# EAGLE board dac (EAGLE 9.0.1)
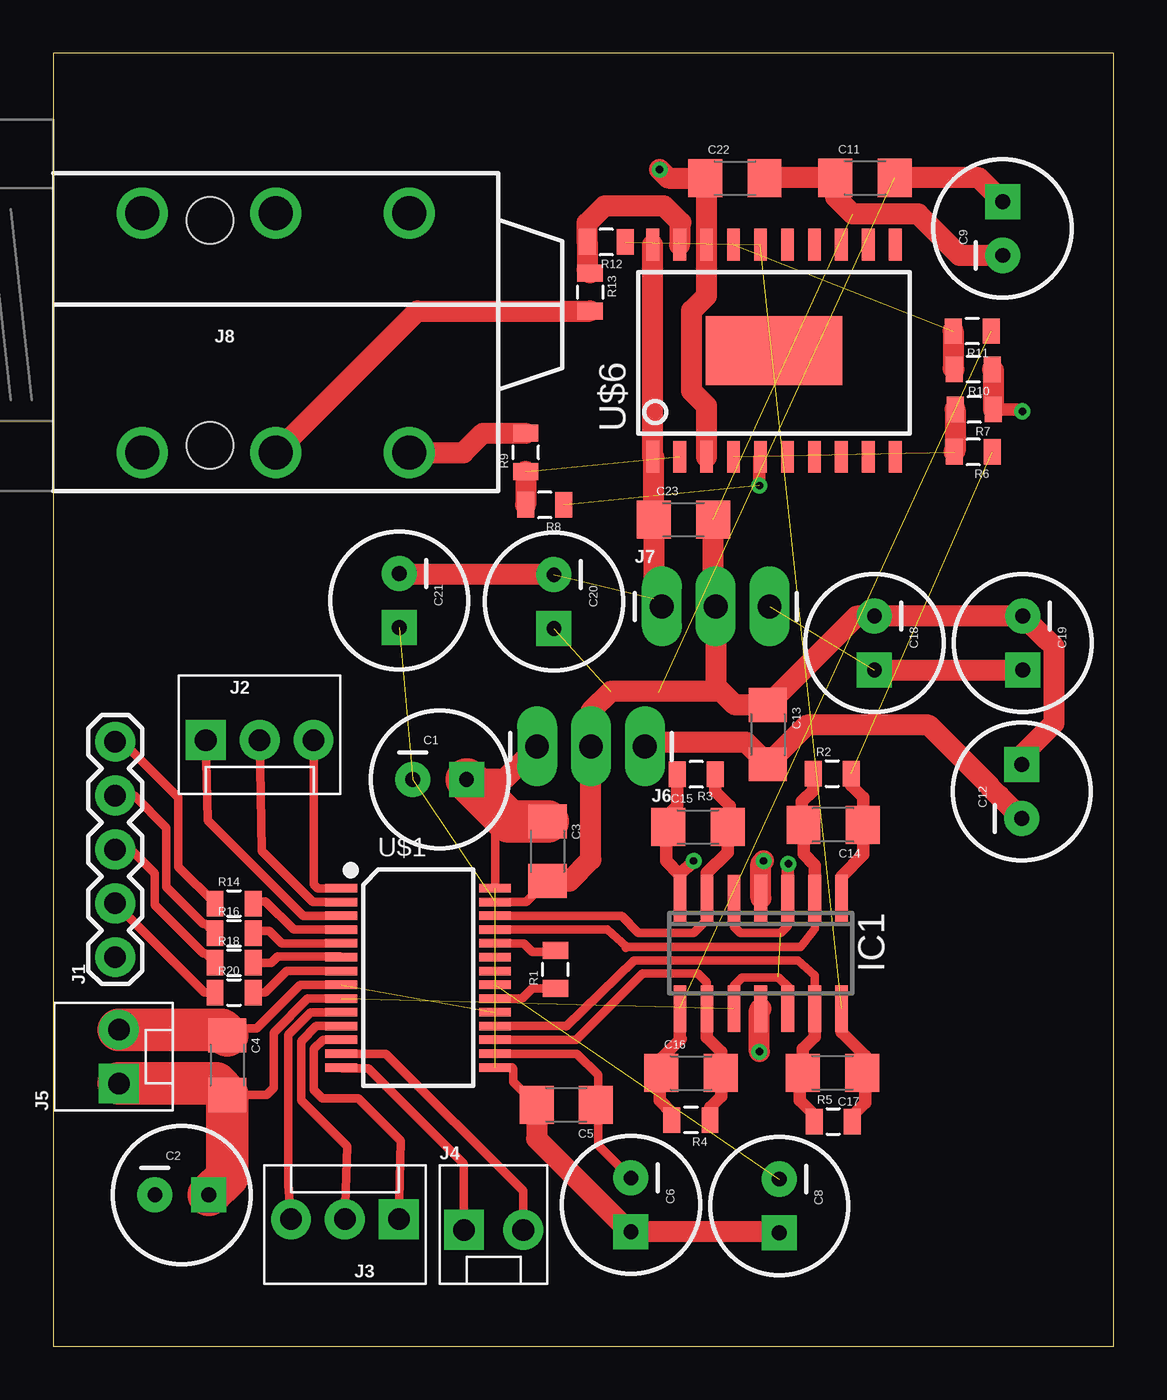
[diagram p0: board, top side]
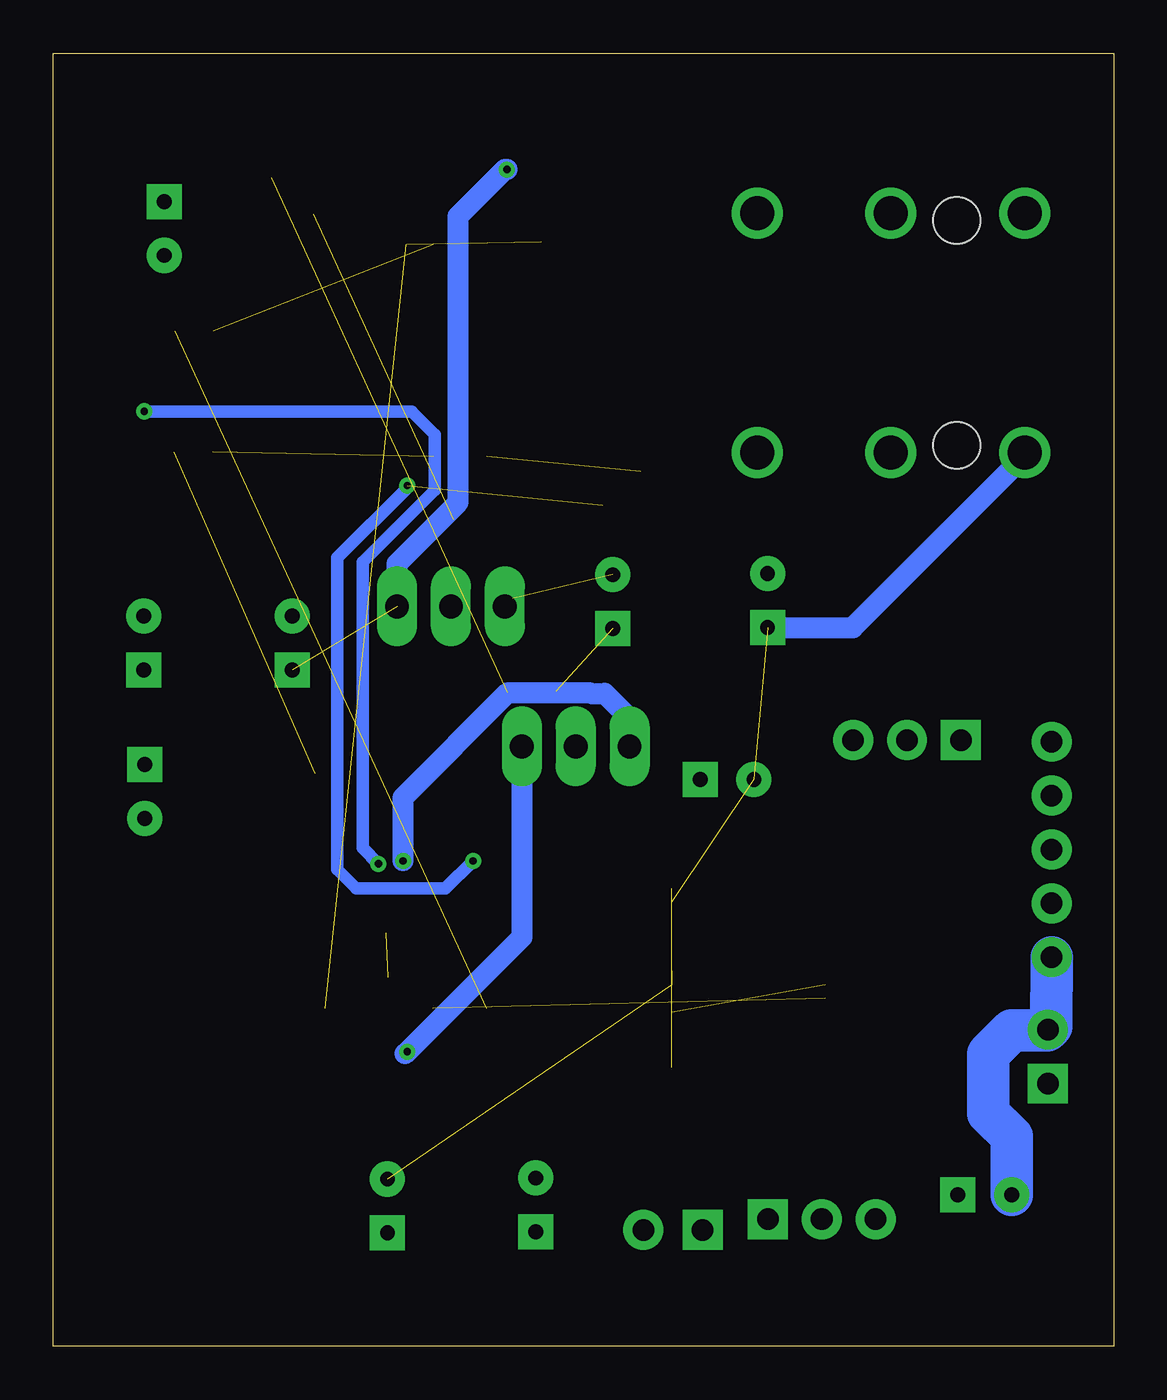
[diagram p1: board, bottom side, seen from below]

Size 50 x 61 mm. Coordinates in mm from the lower left corner, seen from the top.
Outline: 0,0 50,0 50,61 0,61 0,0
Copper layers (1*16): Top 0.035mm / dielectric 0.2mm / Bottom 0.035mm
Design rules "default *": minimum track width 6mil, minimum drill 0.35mm, track to track 6mil, track to pad 6mil, pad to pad 6mil, via to via 6mil, smd to smd 6mil, copper to edge 40mil, drill to drill 6mil, minimum pad ring 10mil, minimum via ring 8mil, stop-mask expansion 4mil, vias tented up to drill 0mil, thermal gap 10mil

## Footprints (pad centres in the part's own frame; a part is rotated, then mirrored left to right if it is on the bottom)
CPOL-RADIAL-100UF-25V = drill 0.7 pad 1.651 square: 1 1.27,0 | drill 0.7 pad 1.651: 2 -1.27,0
1206 = smd 1.6 x 1.8: 1 -1.4,0; 2 1.4,0
SO14 = smd 0.6 x 2.2: 1 -3.81,-2.6; 2 -2.54,-2.6; 3 -1.27,-2.6; 4 0,-2.6; 5 1.27,-2.6; 6 2.54,-2.6; 7 3.81,-2.6; 8 3.81,2.6; 9 2.54,2.6; 10 1.27,2.6; 11 0,2.6; 12 -1.27,2.6; 13 -2.54,2.6; 14 -3.81,2.6
1X05 = drill 1.016 pad 1.88: 1 0,0; 2 2.54,0; 3 5.08,0; 4 7.62,0; 5 10.16,0
MOLEX-1X3 = drill 1.016 pad 1.88 square: 1 0,0 | drill 1.016 pad 1.88: 2 2.54,0; 3 5.08,0
MOLEX-1X2_LOCK = drill 1.016 pad 1.88 square: 1 -0.127,0 | drill 1.016 pad 1.88: 2 2.667,0
MOLEX-1X2 = drill 1.016 pad 1.88 square: 1 0,0 | drill 1.016 pad 1.88: 2 2.54,0
1X03_LONGPADS = drill 1.118 pad 1.88 long: 1 0,0; 2 2.54,0; 3 5.08,0
AUDIO_JACK_0.25"_TRS_PTH_RA = drill 1.6: RING 10.5,-6.95; RING-NORM 10.5,4.35; SLEEVE 4.2,-6.95; SLEEVE-NORM 4.2,4.35; TIP 16.8,-6.95; TIP-NORM 16.8,4.35 | hole 2.2: 7.4,4; 7.4,-6.6
0805 = smd 0.8 x 1.2: 1 -0.9,0; 2 0.9,0
SSOP28-0.65-10.2X5.2MM = smd 0.4 x 1.5: 1 -4.225,-3.625; 2 -3.575,-3.625; 3 -2.925,-3.625; 4 -2.275,-3.625; 5 -1.625,-3.625; 6 -0.975,-3.625; 7 -0.325,-3.625; 8 0.325,-3.625; 9 0.975,-3.625; 10 1.625,-3.625; 11 2.275,-3.625; 12 2.925,-3.625; 13 3.575,-3.625; 14 4.225,-3.625; 15 4.225,3.625; 16 3.575,3.625; 17 2.925,3.625; 18 2.275,3.625; 19 1.625,3.625; 20 0.975,3.625; 21 0.325,3.625; 22 -0.325,3.625; 23 -0.975,3.625; 24 -1.625,3.625; 25 -2.275,3.625; 26 -2.925,3.625; 27 -3.575,3.625; 28 -4.225,3.625
SOIC20S = smd 0.6 x 1.5: 1 -5.715,-5; 2 -4.445,-5; 3 -3.175,-5; 4 -1.905,-5; 5 -0.635,-5; 6 0.635,-5; 7 1.905,-5; 8 3.175,-5; 9 4.445,-5; 10 5.715,-5; 11 5.715,5; 12 4.445,5; 13 3.175,5; 14 1.905,5; 15 0.635,5; 16 -0.635,5; 17 -1.905,5; 18 -3.175,5; 19 -4.445,5; 20 -5.715,5 | smd 6.452 x 3.251: P$1 0,0

## Placement (x,y rotation side)
C1  10uF  [CPOL-RADIAL-100UF-25V]  18.23,26.75 0 top
C2  10uF  [CPOL-RADIAL-100UF-25V]  6.08,7.14 0 top
C3  0.1uF  [1206]  23.31,23.35 270 top
C4  0.1uF  [1206]  8.21,13.27 270 top
C5  0.1uF  [1206]  24.19,11.39 180 top
C6  10uF  [CPOL-RADIAL-100UF-25V]  27.25,6.67 270 top
C8  47uF  [CPOL-RADIAL-100UF-25V]  34.23,6.62 270 top
C9  10uF  [CPOL-RADIAL-100UF-25V]  44.77,52.73 90 top
C11  0.1uF  [1206]  38.29,55.11 0 top
C12  10uF  [CPOL-RADIAL-100UF-25V]  45.67,26.18 90 top
C13  0.1uF  [1206]  33.7,28.86 270 top
C14  2.7nF  [1206]  36.78,24.6 180 top
C15  2.7nF  [1206]  30.4,24.5 0 top
C16  2.7nF  [1206]  30.08,12.9 0 top
C17  2.7nF  [1206]  36.74,12.9 180 top
C18  100uF  [CPOL-RADIAL-100UF-25V]  38.73,33.17 270 top
C19  10uF  [CPOL-RADIAL-100UF-25V]  45.72,33.17 270 top
C20  10uF  [CPOL-RADIAL-100UF-25V]  23.61,35.12 270 top
C21  100uF  [CPOL-RADIAL-100UF-25V]  16.32,35.17 270 top
C22  0.1uF  [1206]  32.14,55.1 0 top
C23  0.1uF  [1206]  29.72,39 0 top
IC1  OPA4134UA  [SO14]  33.37,18.54 180 top
J1  [1X05]  2.93,18.36 90 top
J2  [MOLEX-1X3]  7.2,28.6 0 top
J3  [MOLEX-1X3]  16.3,6 180 top
J4  [MOLEX-1X2_LOCK]  19.5,5.5 0 top
J5  [MOLEX-1X2]  3.1,12.4 90 top
J6  [1X03_LONGPADS]  27.9,28.3 180 top
J7  [1X03_LONGPADS]  28.7,34.9 0 top
J8  AUDIO_JACK_TRS_0.25"_PTH_RA  [AUDIO_JACK_0.25"_TRS_PTH_RA]  0,49.1 0 top
R1  10K  [0805]  23.68,17.78 90 top
R2  1K  [0805]  36.73,27.02 0 top
R3  1K  [0805]  30.32,26.98 180 top
R4  1K  [0805]  30.07,10.69 180 top
R5  1K  [0805]  36.78,10.62 0 top
R6  1K  [0805]  43.38,42.19 180 top
R7  1K  [0805]  43.43,44.19 180 top
R8  1K  [0805]  23.18,39.69 180 top
R9  39.2  [0805]  22.29,42.17 90 top
R10  1K  [0805]  43.38,46.09 180 top
R11  1K  [0805]  43.34,47.88 180 top
R12  1K  [0805]  26.08,52.08 180 top
R13  39.2  [0805]  25.32,49.73 270 top
R14  [0805]  8.54,20.89 0 top
R16  [0805]  8.54,19.49 0 top
R18  [0805]  8.54,18.09 0 top
R20  [0805]  8.54,16.7 0 top
U$1  PCM1794A  [SSOP28-0.65-10.2X5.2MM]  17.21,17.39 270 top
U$6  TPA6120A2  [SOIC20S]  33.99,46.96 0 top

## Library data of the parts
C1-C6 C8 C9 C11-C23 R1-R14 R16 R18 R20 = SparkFun-Passives
IC1 = linear; SPICEPREFIX: J
J1 J6 J7 = SparkFun-Connectors
J2 J3 = SparkFun-Connectors; PROD_ID: CONN-08625; SF_ID: PRT-08096
J4 J5 = SparkFun-Connectors; SF_ID: PRT-09918
J8 = SparkFun-Connectors; PROD_ID: CONN-12339; SF_ID: COM-11144
U$1 U$6 = EduAreaLib

## Nets
3.3V: C2.1 C4.2 IC1.3 IC1.5 IC1.10 IC1.12 J5.1 R7.1 R10.1 U$1.9
5V: C1.1 C3.1 C5.2 C6.1 C8.1 C9.1 C11.2 IC1.4 J6.3 U$1.15 U$1.23 U$1.28
!RST!: J4.1 U$1.14
+12V: C18.1 C19.1 C22.1 J7.3 U$6.3 U$6.18
-5V: C12.2 C13.2 IC1.11 J6.1
-12V: C20.2 C21.2 C23.1 J7.1 U$6.1 U$6.20
BCK: R18.2 U$1.6
CHSL: J2.2 U$1.2
DATA: R16.2 U$1.5
DEM: J2.1 U$1.3
DGND: C1.2 C2.2 C3.2 C4.1 C5.1 C6.2 C9.2 C11.1 C12.1 C13.1 C18.2 C19.2 C20.1 C21.1 C22.2 C23.2 J1.1 J5.2 J6.2 J7.2 J8.SLEEVE R1.2 U$1.8 U$1.16 U$1.19 U$1.24 U$1.27
FMT0: J3.2 U$1.11
FMT1: J3.1 U$1.12
LOUT: J8.TIP R9.2
LRCK: R14.2 U$1.4
MONO: J2.3 U$1.1
MUTE: J3.3 U$1.10
N$1: C15.2 IC1.6 R3.1 U$1.26
N$2: C14.2 IC1.2 R2.1 U$1.25
N$3: R1.1 U$1.20
N$4: R6.2 R7.2 U$6.4
N$5: C14.1 IC1.1 R2.2 R6.1
N$6: C8.2 U$1.21 U$1.22
N$7: J1.5 R14.1
N$8: C15.1 IC1.7 R3.2 R8.1 U$6.5
N$9: R8.2 R9.1 U$6.2
N$10: R10.2 R11.2 U$6.17
N$11: R12.2 R13.1 U$6.19
N$12: C16.1 IC1.8 R4.2 R11.1
N$13: J1.4 R16.1
N$14: C16.2 IC1.9 R4.1 U$1.17
N$16: J1.3 R18.1
N$17: C17.2 IC1.13 R5.1 U$1.18
N$19: J1.2 R20.1
N$25: C17.1 IC1.14 R5.2 R12.1 U$6.16
ROUT: J8.RING R13.2
SYSCK: R20.2 U$1.7
ZERO: J4.2 U$1.13

## Tracks (layer width: path | path; a pad name or v marks a point on that pad's centre or on a via)
3.3V  (via drill 0.35)  (2 unrouted)
  Top 0.4: U$1.9 12.01,16.41 10.4,14.8 10.4,12.2 10.07,11.87 C4.2 | IC1.3 34.64,19.84 34.3,19.5 32.4,19.5 32.1,19.8 IC1.5 | IC1.10 32.1,17 32.5,17.4 34.2,17.4 34.7,16.9 34.64,16.84 IC1.12
  Top 0.6: IC1.3 34.64,22.76 34.6,22.8 34.62,22.8 v34.66,22.76 | v45.7,44.1 45.62,44.19 R7.1
  Top 1: R10.1 44.33,46.04 R7.1
  Top 2: J5.1 7.69,12.4 C4.2 8.21,8.01 C2.1
  Bottom 0.6: v34.66,22.76 35.4,23.5 35.4,37 32,40.4 32,43 33.1,44.1 v45.7,44.1
5V  (via drill 0.35)  (3 unrouted)
  Top 0.4: U$1.28 20.84,24.11 21.49,24.75 | C5.2 21.7,12.48 21.7,13.1 21.64,13.16 U$1.15
  Top 1: C8.1 34.19,5.41 C6.1 27.2,5.41 22.8,9.8 C5.2 | J6.3 21.27,26.75 C1.1 | IC1.4 33.37,22.77 v33.5,22.9 | C9.1 43.65,55.11 C11.2
  Top 2: C3.1 21.49,24.75 C1.1
  Bottom 1: v33.5,22.9 33.5,25.89 28.56,30.83 24.7,30.83 24.67,30.8 24,30.8 22.82,29.62 J6.3
!RST!
  Top 0.4: J4.1 19.37,8.62 14.87,13.12 13.63,13.12 U$1.14
+12V  (via drill 0.35)  (1 unrouted)
  Top 1: C18.1 C19.1 | U$6.3 30.81,44.36 30.11,45.06 30.11,48.85 30.81,49.56 U$6.18 30.81,55.03 C22.1 29,55.1 v28.6,55.5
  Bottom 1: J7.3 33.78,36.92 30.9,39.8 30.9,53.3 28.7,55.5 v28.6,55.5
-5V  (via drill 0.35)
  Top 1: v33.3,13.9 33.3,15.87 IC1.11 | J6.1 28.1,28.5 32.66,28.5 C13.2 35.54,29.3 41.28,29.3 44.2,26.38 44.2,26.35 44.58,25.97 44.61,25.97 C12.2
  Bottom 1: J6.1 27.9,19.3 v33.3,13.9 33.4,13.8
-12V  (1 unrouted)
  Top 1: J7.1 28.32,35.28 C23.1 28.32,41.91 U$6.1 U$6.20 | C20.2 16.36,36.4 C21.2
BCK
  Top 0.4: R18.2 10.29,18.09 10.6,18.4 13.55,18.4 U$1.6
CHSL
  Top 0.4: U$1.2 12.24,20.96 9.84,23.36 J2.2
DATA
  Top 0.4: U$1.5 10.79,19.01 10.2,19.6 9.54,19.6 R16.2
DEM
  Top 0.4: U$1.3 11.79,20.31 7.3,24.8 J2.1
DGND  (8 unrouted)
  Top 0.4: C4.1 8.54,15 9.6,15 11.66,17.06 U$1.8 | U$1.24 22.19,19.01 22.6,18.6 23.6,18.6 R1.2 | U$1.27 22.32,20.96 C3.2 | U$1.16 24.69,13.81 25.7,12.8 25.7,11 | 25.7,11 25.8,10.9 | 25.7,11 25.59,11.11 C5.1 | C6.2 25.7,9.49 25.7,11
  Top 1: C3.2 24.35,21.95 25.36,22.96 J6.2 | C13.1 32.14,30.26 31.5,30.9 | 31.5,30.9 26.3,30.9 25.36,29.96 J6.2 | 33.74,30.3 C13.1 | J6.2 25.2,28.46 | 31.5,30.9 31.24,31.16 J7.2 31.12,35.02 C23.2 | C13.1 37.88,34.45 C18.2 C19.2 46.78,33.38 46.81,33.38 47.19,33 47.19,29.39 45.67,27.88 C12.1 | C22.2 33.55,55.11 C11.1 36.89,54.21 37.7,53.4 40.8,53.4 42.74,51.45 C9.2
  Top 2: C4.1 7.95,14.94 J5.2
  Bottom 1: J8.SLEEVE 4.78,41.57 4.78,41.42 12.29,33.91 C21.1
  Bottom 2: C2.2 4.8,9.9 5.9,11 5.9,13.8 4.8,14.9 3.14,14.9 J5.2 2.95,15.09 J1.1
FMT0
  Top 0.4: 13.58,15.1 U$1.11 12.41,15.11 11.7,14.4 11.7,11.6 13.86,9.44 J3.2
FMT1
  Top 0.4: J3.1 16.4,9.7 14.4,11.7 12.7,11.7 12.3,12.1 12.3,14.03 12.74,14.47 U$1.12
LOUT
  Top 1: J8.TIP 19.35,42.15 20.27,43.07 R9.2
LRCK
  Top 0.4: U$1.4 11.34,19.66 10,21 9.55,21 R14.2
MONO
  Top 0.4: U$1.1 12.49,21.61 12.3,21.8 12.3,26.52 J2.3
MUTE
  Top 0.4: U$1.10 12.16,15.76 11.1,14.7 11.1,7.62 J3.3
N$1
  Top 0.4: IC1.6 30.83,20.13 30.2,19.5 27.6,19.5 26.8,20.3 U$1.26
  Top 0.6: R3.1 31.22,26.18 31.9,25.5 31.9,24.6 C15.2 31.8,23.3 30.83,22.33 IC1.6
N$2
  Top 0.4: U$1.25 26.14,19.66 27.05,18.85 | 27.05,18.85 27,18.8 | 27.05,18.85 35.25,18.85 35.9,19.7 35.91,19.79 IC1.2
  Top 0.6: IC1.2 35.91,22.69 35.38,23.22 35.38,24.2 | 35.38,24.2 C14.2 | R2.1 35.83,26.23 35.3,25.7 35.3,24.28 35.38,24.2
N$3
  Top 0.4: U$1.20 22.11,16.41 22.58,16.88 R1.1
N$4  (1 unrouted)
  Top 1: R7.2 42.53,42.24 R6.2
N$5  (1 unrouted)
  Top 0.6: R2.2 37.63,26.47 38.2,25.9 38.2,24.62 | 38.2,24.62 C14.1 | IC1.1 37.18,22.18 38.2,23.2 38.2,24.62
N$6  (2 unrouted)
N$7
  Top 0.4: R14.1 5.9,22.62 5.9,25.9 3.28,28.52 J1.5
N$8  (via drill 0.35)  (1 unrouted)
  Top 0.6: 28.9,24.4 28.9,22.9 29.56,22.24 IC1.7 29.56,22.26 v30.2,22.9 | 28.9,24.4 C15.1 | R3.2 29.42,25.52 28.9,25 28.9,24.4 | v33.3,40.6 33.3,41.91 U$6.5
  Bottom 0.6: v30.2,22.9 31.5,21.6 35.7,21.6 36.6,22.5 36.6,37.2 33.4,40.4 33.4,40.5 v33.3,40.6
N$9  (1 unrouted)
  Top 1: R9.1 R8.2
N$10  (1 unrouted)
  Top 1: R11.2 42.44,46.13 R10.2
N$11
  Top 1: R13.1 25.18,50.77 R12.2 25.18,52.98 26,53.8 28.8,53.8 29.6,53 29.54,52.94 U$6.19
N$12  (1 unrouted)
  Top 0.6: IC1.8 29.56,14.54 29.6,14.5 28.68,13.58 C16.1 28.6,12.82 28.6,11.6 29.17,11.03 R4.2
N$13
  Top 0.4: 7.6,19.46 R16.1 7.19,19.94 7.09,19.94 5.35,21.68 5.35,24.45 3.82,25.98 J1.4
N$14
  Top 0.4: IC1.9 30.83,17.17 30.4,17.6 27.8,17.6 24.66,14.46 U$1.17
  Top 0.6: R4.1 30.97,11.27 31.5,11.8 31.5,12.88 | 31.5,12.88 C16.2 | IC1.9 30.83,14.57 31.5,13.9 31.5,12.88
N$16
  Top 0.4: 7.43,18.3 R18.1 7.19,18.54 7.09,18.54 4.79,20.83 4.79,22.3 3.66,23.44 J1.3
N$17
  Top 0.4: 36,15.85 IC1.13 35.91,17.49 35.1,18.2 27.4,18.2 24.2,15.1 24.19,15.11 U$1.18
  Top 0.6: IC1.13 35.91,14.61 35.34,14.04 C17.2 35.2,12.76 35.2,11.6 35.88,10.92 R5.1
N$19
  Top 0.4: R20.1 7.12,16.7 J1.2
N$25  (2 unrouted)
  Top 0.6: R5.2 37.68,10.88 38.3,11.5 38.3,12.74 | 38.3,12.74 C17.1 | IC1.14 37.18,14.82 38.3,13.7 38.3,12.74
ROUT
  Top 1: J8.RING 17.18,48.83 R13.2
SYSCK
  Top 0.4: U$1.7 11.01,17.71 10,16.7 R20.2
ZERO
  Top 0.4: U$1.13 15.69,13.81 22.17,7.33 J4.2